# Altium PCB VECTOR.PcbDoc (part 2 of 2)
Units mm, origin at the board's own origin, x right, y up, seen from the top; angles counter-clockwise.
Board outline 152.4 x 101.6 mm, 4 copper layers (Top Layer, VCC, Ground, Bottom Layer), stack 0.778 mm thick; 115 components, 252 nets, 1062 pads, 87 vias.
Unrouted connection lines stored in the file: 78.
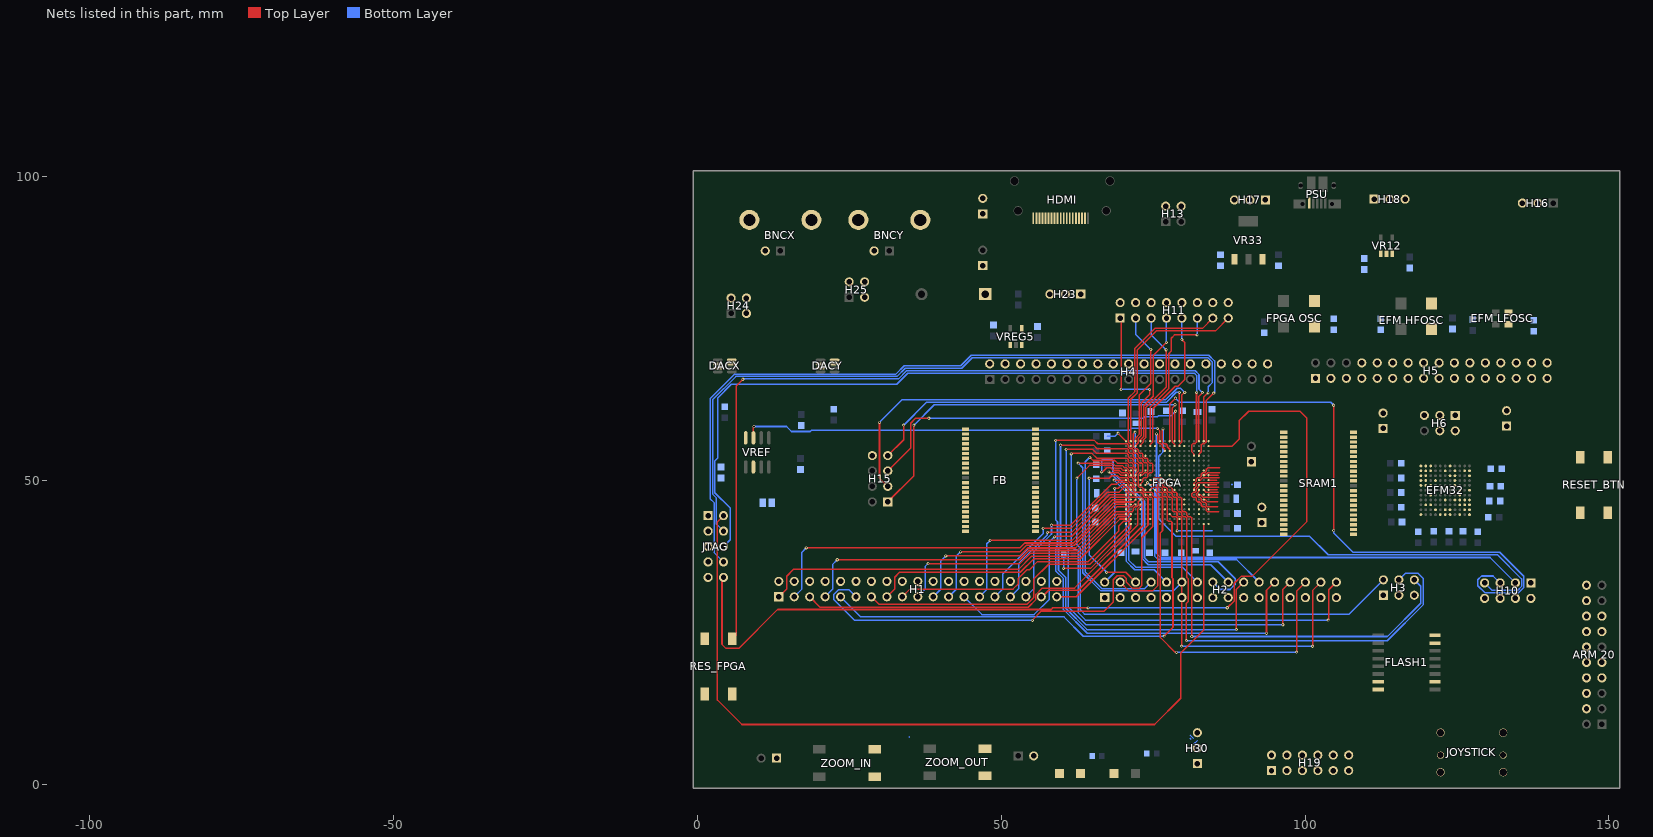
[diagram p4: the nets of this part, all layers, seen from the top]

## Via types
v1: diameter 0.508, hole 0.254, Top Layer to Bottom Layer, 87 vias

## Nets (pads, with @x,y where several pads share a name; then routed paths per layer and width w, separated by ;. In a path a pad name is that pad's centre, name@x,y a point inside that pad or via, vN(x,y) a via of type N, cw(c..) or ccw(c..) an arc to the next point about the centre after c; other vN are vias at no path point) (continued)
EBI.D3: EFM32.B3 FPGA.K15 H5.8 | length 6.1
  Top Layer w0.254: FPGA.K15@81.743,49.257 81.743,49.498 82.145,49.9 82.145,50.255 82.35,50.46 82.745,50.46 82.95,50.665 82.95,51.04 83.18,51.27 83.495,51.27 83.76,51.535 83.76,51.84 83.985,52.065 85.965,52.065
EBI.D4: EFM32.A3 FPGA.K16 H5.10 | length 8.6
  Top Layer w0.254: FPGA.K16@82.543,49.257 82.543,49.033 82.14,48.63 82.14,48.295 81.88,48.035 81.585,48.035 81.375,47.825 81.375,47.45 81.57,47.255 81.95,47.255 82.14,47.065 82.14,46.66 82.345,46.455 82.715,46.455 82.95,46.22 82.95,45.91 83.195,45.665 83.52,45.665 83.73,45.455 83.73,45.105 83.955,44.88 85.805,44.88
EBI.D5: EFM32.B2 FPGA.L15 H5.12 | length 4.9
  Top Layer w0.254: FPGA.L15@81.743,48.457 81.743,48.708 82.14,49.105 82.14,49.41 82.385,49.655 85.775,49.655
EBI.D6: EFM32.A2 FPGA.L16 H5.14 | length 5.7
  Top Layer w0.254: FPGA.L16@82.543,48.457 82.543,48.208 82.15,47.815 82.15,47.56 82.475,47.235 82.72,47.235 82.935,47.02 82.935,46.705 83.195,46.445 83.51,46.445 83.735,46.22 83.735,45.925 83.98,45.68 85.655,45.68
EBI.D7: EFM32.A1 FPGA.H17 H5.16 | length 2.8
  Top Layer w0.254: FPGA.H17@83.343,50.857 83.602,50.857 84,51.255 85.95,51.255
EBI.D8: EFM32.B1 FPGA.H18 H5.18 | length 1.6
  Top Layer w0.254: FPGA.H18@84.143,50.857 85.723,50.857
EBI.D9: EFM32.C2 FPGA.J16 H5.20 | length 3.5
  Top Layer w0.254: FPGA.J16@82.543,50.057 82.807,50.057 83.22,50.47 85.91,50.47
EBI.D10: EFM32.C1 FPGA.J18 H5.22 | length 1.4
  Top Layer w0.254: FPGA.J18@84.143,50.057 85.512,50.057
EBI.D11: EFM32.D2 FPGA.K17 H5.24 | length 2.6
  Top Layer w0.254: FPGA.K17@83.343,49.257 83.74,48.86 85.77,48.86
EBI.D12: EFM32.D1 FPGA.K18 H5.26 | length 1.4
  Top Layer w0.254: FPGA.K18@84.143,49.257 85.507,49.257
EBI.D13: EFM32.E3 FPGA.L17 H5.28 | length 2.5
  Top Layer w0.254: FPGA.L17@83.343,48.457 83.73,48.07 85.73,48.07
EBI.D14: EFM32.E2 FPGA.L18 H5.30 | length 1.4
  Top Layer w0.254: FPGA.L18@84.143,48.457 85.537,48.457
EBI.D15: EFM32.E1 FPGA.M16 H5.32 | length 3.2
  Top Layer w0.254: FPGA.M16@82.543,47.657 82.808,47.657 83.195,47.27 85.605,47.27
EBI.REN: EFM32.A7 FPGA.N17 H6.4 | length 2.5
  Top Layer w0.254: FPGA.N17@83.343,46.857 83.583,46.857 83.975,46.465 85.64,46.465
EBI.WEN: EFM32.B6 FPGA.M18 H6.2 | length 1.5
  Top Layer w0.254: FPGA.M18@84.143,47.657 85.617,47.657
FB.A0: FPGA.N4 H1.1 | length 68.1
  Top Layer w0.254: H1.1@13.445,30.865 14.74,32.16 14.74,34.26 15.84,35.36 52.865,35.36 55.07,37.565 62.82,37.565 69.325,44.07 70.65,44.07 70.925,44.345 70.925,44.625 71.16,44.86 71.585,44.86 71.725,45 71.725,45.38 72.03,45.685 72.315,45.685 72.565,45.935 72.565,46.479 FPGA.N4@72.943,46.857
FB.A1: FPGA.N3 H1.3 | length 66.3
  Top Layer w0.254: v1(17.965,38.915) 53.11,38.915 53.91,39.715 61.88,39.715 68.62,46.455 71.741,46.455 FPGA.N3@72.143,46.857
  Bottom Layer w0.254: H1.3@15.985,30.865 17.25,32.13 17.25,38.2 v1(17.965,38.915)
FB.A2: FPGA.P4 H1.5 | length 64.3
  Top Layer w0.254: H1.5@18.525,30.865 20.23,29.16 54.47,29.16 55.735,30.425 55.735,31.255 56.78,32.3 62.105,32.3 72.525,42.72 72.525,45.37 72.943,45.788 FPGA.P4@72.943,46.057
FB.A3: FPGA.P3 H1.7 | length 60
  Top Layer w0.254: v1(23.065,36.96) 53.06,36.96 54.575,38.475 62.515,38.475 68.885,44.845 70.665,44.845 70.94,45.12 70.94,45.44 71.145,45.645 71.49,45.645 71.902,46.057 FPGA.P3@72.143,46.057
  Bottom Layer w0.254: H1.7@21.065,30.865 22.295,32.095 22.295,36.19 v1(23.065,36.96)
FB.A4: FPGA.L6 H1.9 | length 84
  Top Layer w0.254: FPGA.L6@74.543,48.457 74.956,48.87 75.555,48.87 75.775,48.65 75.775,48.21 75.915,48.07 76.395,48.07 76.56,47.905 76.56,47.52 76.78,47.3 77.155,47.3 77.35,47.105 77.35,43.46 77.535,43.275 77.94,43.275 78.12,43.095 78.12,34.01 78.285,33.845 78.285,25.85 v1(76.825,24.39)
  Bottom Layer w0.254: H1.9@23.605,30.865 26.91,27.56 60.365,27.56 63.535,24.39 v1(76.825,24.39)
FB.A5: FPGA.M5 H1.11 | length 80.5
  Top Layer w0.254: v1(55.155,26.98) 55.155,27.035 56.59,28.47 66.925,28.47 68.47,30.015 68.47,33.68 69.105,34.315 70.15,34.315 70.62,33.845 70.62,33.265 71.64,32.245 72.66,32.245 73.155,32.74 73.155,40.595 74.935,42.375 74.935,47.025 74.69,47.27 74.415,47.27 74.028,47.657 FPGA.M5@73.743,47.657
  Bottom Layer w0.254: H1.11@26.145,30.865 24.96,32.05 23.315,32.05 22.485,31.22 22.485,30.43 25.935,26.98 v1(55.155,26.98)
FB.A6: FPGA.U2 H1.13 | length 51.2
  Top Layer w0.254: H1.13@28.685,30.865 29.95,29.6 54.245,29.6 55.35,30.705 55.35,33.735 57.83,36.215 64.64,36.215 71.005,42.58 ; 70.991,42.594 70.991,43.041 71.343,43.393 FPGA.U2@71.343,43.657
FB.A7: FPGA.U1 H1.15 | length 45.7
  Top Layer w0.254: H1.15@31.225,30.865 32.52,32.16 32.52,34.09 33.32,34.89 53.17,34.89 55.405,37.125 63.016,37.125 69.548,43.657 FPGA.U1@70.543,43.657
FB.A8: FPGA.T2 H1.17 | length 44.6
  Top Layer w0.254: H1.17@33.765,30.865 35.035,32.135 51.985,32.135 52.865,33.015 52.865,33.9 54.245,35.28 54.63,35.28 56.005,36.655 64.335,36.655 69.355,41.675 69.355,42.5 70.115,43.26 70.73,43.26 70.94,43.47 70.94,43.76 71.312,44.132 71.343,44.132 FPGA.T2@71.343,44.457 FPGA.T2@71.313,44.457
FB.A9: FPGA.T1 H1.19 | length 42.1
  Top Layer w0.254: v1(38.005,36.325) 53.115,36.325 54.795,38.005 62.625,38.005 69.077,44.457 FPGA.T1@70.543,44.457
  Bottom Layer w0.254: H1.19@36.305,30.865 37.51,32.07 37.51,35.83 v1(38.005,36.325)
FB.A10: FPGA.P2 H1.21 | length 41.5
  Top Layer w0.254: v1(40.9,37.595) 53.085,37.595 54.38,38.89 62.27,38.89 69.065,45.685 70.69,45.685 71.062,46.057 FPGA.P2@71.343,46.057
  Bottom Layer w0.254: H1.21@38.845,30.865 40.075,32.095 40.075,36.77 v1(40.9,37.595)
FB.A11: FPGA.P1 H1.23 | length 38.6
  Top Layer w0.254: v1(43.33,38.255) 53.115,38.255 54.19,39.33 62.045,39.33 68.772,46.057 FPGA.P1@70.543,46.057
  Bottom Layer w0.254: H1.23@41.385,30.865 42.64,32.12 42.64,37.565 v1(43.33,38.255)
FB.A12: FPGA.N2 H1.25 | length 42.3
  Top Layer w0.254: v1(58.765,40.71) 58.86,40.805 61.65,40.805 68.1,47.255 70.665,47.255 71.063,46.857 FPGA.N2@71.343,46.857
  Bottom Layer w0.254: H1.25@43.925,30.865 46.85,27.94 55.43,27.94 57.925,30.435 57.925,39.87 v1(58.765,40.71)
FB.A13: FPGA.N1 H1.27 | length 35.1
  Top Layer w0.254: v1(48.21,40.13) 61.66,40.13 68.387,46.857 FPGA.N1@70.543,46.857
  Bottom Layer w0.254: H1.27@46.465,30.865 47.655,32.055 47.655,39.575 v1(48.21,40.13)
FB.A14: FPGA.M3 H1.29 | length 33.3
  Top Layer w0.254: v1(56.92,42.115) 61.525,42.115 67.48,48.07 69.41,48.07 70.235,48.895 70.675,48.895 70.945,48.625 70.945,48.285 71.18,48.05 71.515,48.05 71.908,47.657 FPGA.M3@72.143,47.657
  Bottom Layer w0.254: H1.29@49.005,30.865 50.25,32.11 50.25,34.56 56.92,41.23 v1(56.92,42.115)
FB.A15: FPGA.M1 H1.31 | length 28.6
  Top Layer w0.254: v1(57.635,41.455) 61.61,41.455 67.812,47.657 FPGA.M1@70.543,47.657
  Bottom Layer w0.254: H1.31@51.545,30.865 52.88,32.2 52.88,36.325 57.635,41.08 v1(57.635,41.455)
FB.A16: FPGA.L2 H1.33 | length 30.3
  Top Layer w0.254: v1(58.3,42.665) 61.465,42.665 68.14,49.34 68.97,49.34 69.3,49.67 70.705,49.67 70.95,49.425 70.95,49.115 71.343,48.722 FPGA.L2@71.343,48.457
  Bottom Layer w0.254: H1.33@54.085,30.865 55.35,32.13 55.35,38.23 58.3,41.18 v1(58.3,42.665)
FB.A17: FPGA.L1 H1.35 | length 29.6
  Top Layer w0.254: H1.35@56.78,30.865 57.863,31.948 62.703,31.948 73.38,42.625 73.38,46.965 73.075,47.27 71.115,47.27 70.925,47.46 70.925,47.805 70.543,48.187 FPGA.L1@70.543,48.457
FB.A18: FPGA.K2 H1.37 | length 28.5
  Top Layer w0.254: H1.37@59.165,30.865 62.39,30.865 74.175,42.65 74.175,47.08 73.985,47.27 73.57,47.27 73.38,47.46 73.38,47.75 73.06,48.07 72,48.07 71.715,48.355 71.715,48.78 71.343,49.152 FPGA.K2@71.343,49.257
FB.CS: FPGA.J6 H3.6 | length 75.6
  Top Layer w0.254: FPGA.J6@74.543,50.057 74.747,50.057 75.145,50.455 76.345,50.455 76.56,50.24 76.56,49.95 76.855,49.655 77.17,49.655 77.35,49.475 77.35,49.155 77.635,48.87 77.955,48.87 78.16,48.665 78.16,48.305 78.395,48.07 78.74,48.07 78.945,47.865 78.945,47.495 79.17,47.27 79.54,47.27 79.72,47.09 79.72,45.13 79.98,44.87 80.325,44.87 80.545,44.65 80.545,44.31 80.81,44.045 81.18,44.045 81.36,43.865 81.36,24.35 v1(81.375,24.335)
  Bottom Layer w0.254: v1(81.375,24.335) 113.55,24.335 119.03,29.815 119.03,32.608 H3.6@117.983,33.655
FB.D0: FPGA.K1 H2.2 | length 18.2
  Top Layer w0.254: v1(68.69,48.705) 69.3,48.705 69.852,49.257 FPGA.K1@70.543,49.257
  Bottom Layer w0.254: H2.2@67.056,33.274 68.69,34.908 v1(68.69,48.705)
FB.D1: FPGA.L4 H2.4 | length 25
  Top Layer w0.254: H2.4@69.596,33.274 71.04,31.83 74.92,31.83 75.75,32.66 75.75,47.045 75.54,47.255 75.23,47.255 74.95,47.535 74.95,47.835 74.73,48.055 73.57,48.055 73.168,48.457 FPGA.L4@72.943,48.457
FB.D2: FPGA.L3 H2.6 | length 31.5
  Top Layer w0.254: v1(64.475,50.36) 67.785,50.36 68.21,50.785 69.15,50.785 69.48,50.455 70.75,50.455 70.93,50.275 70.93,49.905 71.175,49.66 71.515,49.66 71.75,49.425 71.75,49.16 72.143,48.767 FPGA.L3@72.143,48.457 ; v1(67.37,34.89) 70.52,34.89 H2.6@72.136,33.274
  Bottom Layer w0.254: v1(64.475,50.36) 64.475,37.785 v1(67.37,34.89)
FB.D3: FPGA.J3 H2.8 | length 41.7
  Top Layer w0.254: v1(64.61,53.805) 65.135,53.28 68.715,53.28 69.14,52.855 70.72,52.855 70.96,52.615 70.96,52.275 71.17,52.065 71.55,52.065 71.75,51.865 71.75,50.75 72.143,50.357 FPGA.J3@72.143,50.057
  Bottom Layer w0.254: v1(64.61,53.805) 63.865,53.06 63.865,34.95 66.65,32.165 73.567,32.165 H2.8@74.676,33.274
FB.D4: FPGA.J1 H2.10 | length 24.2
  Top Layer w0.254: v1(68.599,50.055) v1(68.599,50.055) FPGA.J1@70.543,50.057
  Bottom Layer w0.254: v1(68.599,50.055) 70.62,48.034 70.62,36.685 72,35.305 75.185,35.305 H2.10@77.216,33.274
FB.D5: FPGA.H2 H2.12 | length 46.3
  Top Layer w0.254: v1(62.68,52.865) 68.335,52.865 68.76,52.44 69.96,52.44 70.345,52.055 70.66,52.055 70.91,51.805 70.91,51.555 71.343,51.122 FPGA.H2@71.343,50.857
  Bottom Layer w0.254: v1(62.68,52.865) 63.455,52.09 63.455,34.835 66.46,31.83 78.312,31.83 H2.12@79.756,33.274
FB.D6: FPGA.H1 H2.14 | length 31.8
  Top Layer w0.254: v1(67.74,51.42) 67.89,51.27 69.31,51.27 69.723,50.857 FPGA.H1@70.543,50.857
  Bottom Layer w0.254: v1@67.795,51.42 v1(67.74,51.42) 70.98,48.18 70.98,36.93 72.19,35.72 79.85,35.72 H2.14@82.296,33.274
FB.D7: FPGA.K4 H2.16 | length 55.3
  Top Layer w0.254: v1(72.04,57.94) 71.73,57.63 71.73,55.555 72.035,55.25 72.315,55.25 72.535,55.03 72.535,54.745 72.805,54.475 73.15,54.475 73.345,54.28 73.345,53.91 73.59,53.665 73.97,53.665 74.145,53.49 74.145,53.145 74.43,52.86 74.775,52.86 74.935,52.7 74.935,51.47 74.745,51.28 74.415,51.28 74.145,51.01 74.145,50.645 73.98,50.48 73.545,50.48 73.325,50.26 73.325,49.81 72.943,49.428 FPGA.K4@72.943,49.257
  Bottom Layer w0.254: v1(72.04,57.94) 72.04,48.125 73.6,46.565 73.6,37.275 74.26,36.615 85.745,36.615 88.525,33.835 88.525,32.93 87.66,32.065 86.045,32.065 H2.16@84.836,33.274
FB.D8: FPGA.K3 H2.18 | length 45.5
  Top Layer w0.254: v1(66.54,51.42) 66.725,51.42 67.4,52.095 68.04,52.095 68.495,51.64 69.435,51.64 69.815,51.26 70.735,51.26 70.945,51.05 70.945,50.715 71.165,50.495 71.56,50.495 71.765,50.29 71.765,49.915 72.143,49.537 FPGA.K3@72.143,49.257
  Bottom Layer w0.254: v1(66.54,51.42) 66.555,51.435 66.555,53.325 66.76,53.53 68.14,53.53 68.415,53.255 68.415,51.265 73.185,46.495 73.185,37.185 74.235,36.135 84.515,36.135 H2.18@87.376,33.274
FB.D9: FPGA.L5 H2.20 | length 86.3
  Top Layer w0.254: v1(59.785,55.815) 65.22,55.815 65.805,55.23 70.77,55.23 70.925,55.075 70.925,54.72 71.17,54.475 71.535,54.475 71.74,54.27 71.74,53.925 72,53.665 72.365,53.665 72.525,53.505 72.525,53.14 72.79,52.875 73.15,52.875 73.335,52.69 73.335,51.505 73.11,51.28 72.825,51.28 72.535,50.99 72.535,49.095 72.775,48.855 73.225,48.855 73.623,48.457 FPGA.L5@73.743,48.457 ; v1(88.705,25.465) 88.705,32.063 H2.20@89.916,33.274
  Bottom Layer w0.254: v1(59.785,55.815) 59.785,39.025 59.455,38.695 59.455,35.225 60.64,34.04 60.64,28.965 64.14,25.465 v1(88.705,25.465)
FB.D10: FPGA.K5 H2.22 | length 32
  Top Layer w0.254: FPGA.K5@73.743,49.257 73.752,49.257 v1(74.12,49.625)
  Bottom Layer w0.254: v1(74.12,49.625) 75.255,48.49 75.255,37.575 75.83,37 88.73,37 H2.22@92.456,33.274
FB.D11: FPGA.H4 H2.24 | length 92.7
  Top Layer w0.254: v1(58.985,56.59) 65.355,56.59 65.91,56.035 70.745,56.035 70.94,55.84 70.94,55.525 71.205,55.26 71.555,55.26 71.73,55.085 71.73,54.74 71.995,54.475 72.315,54.475 72.545,54.245 72.545,53.945 72.83,53.66 73.13,53.66 73.35,53.44 73.35,53.13 73.6,52.88 73.93,52.88 74.13,52.68 74.13,51.475 73.93,51.275 73.59,51.275 73.172,50.857 FPGA.H4@72.943,50.857 ; v1(93.67,24.855) 93.67,31.948 H2.24@94.996,33.274
  Bottom Layer w0.254: v1(58.985,56.59) 58.985,43.5 59.29,43.195 59.29,39.245 59.015,38.97 59.015,35.11 60.255,33.87 60.255,28.77 64.17,24.855 v1(93.67,24.855)
FB.D12: FPGA.H3 H2.26 | length 85.3
  Top Layer w0.254: v1(60.695,55.1) 65.08,55.1 65.73,54.45 70.735,54.45 70.94,54.245 70.94,53.92 71.21,53.65 71.54,53.65 71.765,53.425 71.765,53.135 72.035,52.865 72.335,52.865 72.535,52.665 72.535,51.5 72.143,51.108 FPGA.H3@72.143,50.857 ; v1(96.37,26.265) 96.37,32.108 H2.26@97.536,33.274
  Bottom Layer w0.254: v1(60.695,55.1) 60.695,39.22 61.08,38.835 61.08,29.16 63.975,26.265 v1(96.37,26.265)
FB.D13: FPGA.L7 H2.28 | length 60.7
  Top Layer w0.254: FPGA.L7@75.343,48.457 75.343,48.182 75.735,47.79 75.735,47.56 76.04,47.255 76.395,47.255 76.56,47.09 76.56,41.73 76.215,41.385 76.215,24.17 78.67,21.715 v1(78.865,21.715) ; v1(98.63,21.77) 98.63,31.828 H2.28@100.076,33.274
  Bottom Layer w0.254: v1(78.865,21.715) 98.575,21.715 v1(98.63,21.77)
FB.D14: FPGA.K6 H2.30 | length 63.4
  Top Layer w0.254: FPGA.K6@74.543,49.257 74.772,49.257 75.155,49.64 75.53,49.64 75.765,49.405 75.765,49.115 75.995,48.885 76.355,48.885 76.55,48.69 76.55,48.355 76.85,48.055 77.145,48.055 77.32,47.88 77.32,47.6 77.665,47.255 77.955,47.255 78.145,47.065 78.145,45.105 78.38,44.87 78.755,44.87 78.945,44.68 78.945,44.295 79.18,44.06 79.55,44.06 79.72,43.89 79.72,22.79 v1(79.69,22.76) ; v1(101.25,22.735) 101.25,31.908 H2.30@102.616,33.274
  Bottom Layer w0.254: v1(79.69,22.76) 101.225,22.76 v1(101.25,22.735)
FB.D15: FPGA.G3 H2.32 | length 87.6
  Top Layer w0.254: v1(61.55,54.385) 61.605,54.44 64.97,54.44 65.73,53.68 70.73,53.68 70.94,53.47 70.94,53.125 71.185,52.88 71.56,52.88 71.75,52.69 71.75,52.345 72.143,51.952 FPGA.G3@72.143,51.657 ; v1(103.815,27.035) 103.895,27.115 103.895,32.013 H2.32@105.156,33.274
  Bottom Layer w0.254: v1(61.55,54.385) 61.55,39.19 62.125,38.615 62.49,38.615 62.665,38.44 62.665,28.265 63.895,27.035 v1(103.815,27.035)
FB.REN: FPGA.J7 H3.4 | length 80.7
  Top Layer w0.254: FPGA.J7@75.343,50.057 75.593,50.057 75.995,49.655 76.355,49.655 76.56,49.45 76.56,49.15 76.855,48.855 77.17,48.855 77.36,48.665 77.36,48.28 77.585,48.055 77.915,48.055 78.16,47.81 78.16,47.52 78.435,47.245 78.74,47.245 78.945,47.04 78.945,45.15 79.235,44.86 79.55,44.86 79.745,44.665 79.745,44.325 80.025,44.045 80.34,44.045 80.56,43.825 80.56,34.05 80.82,33.79 80.82,30.145 80.49,29.815 v1(80.49,23.645) v1@80.56,23.715
  Bottom Layer w0.254: v1(80.49,23.645) 113.52,23.645 119.475,29.6 119.475,33.84 118.59,34.725 116.513,34.725 H3.4@115.443,33.655
FB.WEN: FPGA.G1 H3.2 | length 83.7
  Top Layer w0.254: v1(62.47,50.385) 62.475,50.385 64.555,52.465 68.25,52.465 68.675,52.04 69.695,52.04 70.078,51.657 FPGA.G1@70.543,51.657
  Bottom Layer w0.254: v1(62.47,50.385) 62.47,39.475 63.04,38.905 63.04,28.715 63.73,28.025 107.273,28.025 H3.2@112.903,33.655
FPGAB.CLK+: FPGA.B2 H11.13 | length 31.6
  Top Layer w0.254: FPGA.B2@71.343,55.657 71.343,55.922 70.93,56.335 70.93,63.545 72.025,64.64 72.025,71.75 75.28,75.005 83.133,75.005 H11.13@84.836,76.708
FPGAB.CLK-: FPGA.A2 H11.15 | length 32.6
  Top Layer w0.254: FPGA.A2@71.343,56.457 71.343,63.348 72.44,64.445 72.44,71.505 75.525,74.59 85.258,74.59 H11.15@87.376,76.708
FPGAB.D0+: FPGA.B6 H11.9 | length 23.9
  Top Layer w0.254: FPGA.B6@74.543,55.657 74.543,55.908 74.955,56.32 74.955,61.805 78.645,65.495 79.115,65.495 80.21,66.59 80.21,72.69 v1(79.745,73.155)
  Bottom Layer w0.254: v1(79.745,73.155) 79.745,76.697 H11.9@79.756,76.708
FPGAB.D0-: FPGA.A6 H11.11 | length 25.6
  Top Layer w0.254: FPGA.A6@74.543,56.457 74.543,62.083 77.57,65.11 77.57,70.845 78.01,71.285 78.01,73.405 78.535,73.93 v1(82.255,73.93)
  Bottom Layer w0.254: v1(82.255,73.93) 82.296,73.971 H11.11@82.296,76.708
FPGAB.D1+: FPGA.B4 H11.5 | length 23.8
  Top Layer w0.254: FPGA.B4@72.943,55.657 72.943,55.853 73.365,56.275 73.365,56.605 73.82,57.06 73.82,61.99 77.155,65.325 v1(77.155,71.505)
  Bottom Layer w0.254: H11.5@74.676,76.708 74.676,73.984 v1(77.155,71.505)
FPGAB.D1-: FPGA.A4 H11.7 | length 22
  Top Layer w0.254: FPGA.A4@72.943,56.457 72.943,56.708 73.475,57.24 73.475,62.285 75.03,63.84 75.03,70.535 v1(77.21,72.715)
  Bottom Layer w0.254: v1(77.21,72.715) 77.21,76.702 H11.7@77.216,76.708
FPGAB.D2+: FPGA.B3 H11.1 | length 27.2
  Top Layer w0.254: H11.1@69.596,76.708 69.74,76.564 v1(69.74,64.97) ; FPGA.B3@72.143,55.657 72.143,55.783 72.565,56.205 72.565,56.89 73.1,57.425 73.1,62.79 74.455,64.145 v1(74.455,64.985)
  Bottom Layer w0.254: H11.1@69.596,76.708 H11.1@69.905,76.399 ; v1(69.74,64.97) 69.755,64.985 v1(74.455,64.985)
FPGAB.D2-: FPGA.A3 H11.3 | length 22.3
  Top Layer w0.254: FPGA.A3@72.143,56.457 72.143,56.993 72.715,57.565 72.715,64 74.645,65.93 v1(74.645,71.56)
  Bottom Layer w0.254: H11.3@72.136,76.708 72.136,74.069 v1(74.645,71.56)
GND: "ARM 20.4" "ARM 20.6" "ARM 20.8" "ARM 20.10" "ARM 20.12" "ARM 20.14" "ARM 20.16" "ARM 20.18" "ARM 20.20" "EFM HFOSC.2" "EFM LFOSC.2" "FPGA OSC.2" C1.1 C2.1 C3.1 C4.1 C5.1 C6.1 C7.1 C8.1 C9.1 C10.1 C11.1 C12.1 C13.1 C14.1 C15.1 C16.1 C17.1 C18.1 C19.1 C20.1 C21.1 C22.1 C23.1 C24.1 C25.1 C26.1 C27.1 C28.1 C29.1 C30.1 C31.1 C32.2 C33.2 C34.2 C35.2 C36.2 C37.2 C38.1 C39.2 C40.1 C41.1 C42.1 C43.1 C44.2 C45.2 C46.1 C47.1 C48.2 C49.1 C54.1 C55.1 C56.1 C57.1 C58.1 C59.1 D1.2 D5.2 DACX.6 DACY.6 EFM32.C7 EFM32.D4 EFM32.F9 EFM32.G3 EFM32.G9 EFM32.H6 EFM32.K4 EFM32.K7 EFM32.K10 EFM32.L7 FB.12 FB.34 FB.39 FB.40 FLASH1.10 FPGA.A1 FPGA.A18 FPGA.B7 FPGA.B13 FPGA.C3 FPGA.C16 FPGA.D5 FPGA.D10 FPGA.E15 FPGA.G2 FPGA.G5 FPGA.G12 FPGA.G17 FPGA.H8 FPGA.H10 FPGA.J4 FPGA.J9 FPGA.J11 FPGA.J15 FPGA.K8 FPGA.K10 FPGA.L9 FPGA.L11 FPGA.M2 FPGA.M6 FPGA.M17 FPGA.N13 FPGA.P13 FPGA.R1 FPGA.R4 FPGA.R9 FPGA.R14 FPGA.R16 FPGA.R18 FPGA.T16 FPGA.U6 FPGA.U12 FPGA.V1 FPGA.V18 H16.3 H17.1 H18.1 H23.3 HDMI.2 HDMI.5 HDMI.8 HDMI.11 HDMI.14 HDMI.17 JTAG.3 JTAG.5 JTAG.7 JTAG.9 PSU.5 RES_FPGA.2 RES_FPGA.4 RESET_BTN.1 RESET_BTN.3 SRAM1.12 SRAM1.34 SRAM1.39 SRAM1.40 VR12.2 VR33.1 VREF.4 ZOOM_IN.2 ZOOM_IN.4 ZOOM_OUT.2 ZOOM_OUT.4 | length 3.9
  Top Layer w0.254: v1(69.245,57.775) 69.245,57.755 FPGA.A1@70.543,56.457
  Bottom Layer w0.254: C8.1@67.448,57.277 68.747,57.277 v1(69.245,57.775)
HDMI.5V: H14.2 HDMI.18
HDMI.CEC: H12.1 HDMI.13
HDMI.CLK+: H11.14 HDMI.10
HDMI.CLK-: H11.16 HDMI.12
HDMI.D0+: H11.10 HDMI.7
HDMI.D0-: H11.12 HDMI.9
HDMI.D1+: H11.6 HDMI.4
HDMI.D1-: H11.8 HDMI.6
HDMI.D2+: H11.2 HDMI.1
HDMI.D2-: H11.4 HDMI.3
HDMI.DDC_CLK: H13.2 HDMI.15
HDMI.DDC_DATA: H13.4 HDMI.16
"NetARM 20_7": "ARM 20.7" EFM32.E8
"NetARM 20_9": "ARM 20.9" EFM32.D8
"NetARM 20_13": "ARM 20.13" EFM32.C8
"NetARM 20_15": "ARM 20.15" EFM32.K6 RESET_BTN.2 RESET_BTN.4
NetBNCX_2: BNCX.2 H24.4
NetBNCY_2: BNCY.2 H25.4
NetC37_1: C37.1 EFM32.B11
NetC38_2: C38.2 EFM32.B8 EFM32.B10
NetC39_1: C39.1 EFM32.F11
NetC40_2: C40.2 H17.2 VR33.3
NetC42_2: C42.2 H18.2 VR12.1 VR12.3
NetC48_1: C48.1 C49.2 H30.3 VREF.6 | length 0.2
  Bottom Layer w0.254: 81.11,7.562 81.229,7.442
NetC55_2: "EFM LFOSC.3" C55.2 H26.1
NetC57_2: "EFM HFOSC.3"@120.839,79.134 C57.2 H27.1
NetC59_2: "FPGA OSC.3"@101.535,79.515 C59.2 H28.1
NetC60_2: C60.2 H23.2 VREG5.1 VREG5.3
NetC61_2: C61.2 VREG5.4
NetD4_1: D4.1 R2.1
NetD5_1: D5.1 R3.1
NetDACX_3: DACX.3 DACY.3 H30.2
NetDACX_4: DACX.4 H24.3
NetDACY_4: DACY.4 H25.3
NetEFM32_C11: EFM32.C11 H30.1
NetEFM32_H8: EFM32.H8 H19.12
NetEFM32_H9: EFM32.H9 H19.6
NetEFM32_H10: EFM32.H10 H19.8
NetEFM32_H11: EFM32.H11 H19.10
NetEFM32_J2: EFM32.J2 JTAG.1
NetEFM32_J3: EFM32.J3 H29.1
NetEFM32_J9: EFM32.J9 H21.1
NetEFM32_J10: EFM32.J10 H19.2
NetEFM32_J11: EFM32.J11 H19.4
NetEFM32_K11: EFM32.K11 H20.2
NetEFM32_L1: EFM32.L1 H26.2
NetEFM32_L5: EFM32.L5 H24.2
NetEFM32_L6: EFM32.L6 H25.2
NetEFM32_L9: EFM32.L9 H27.2
NetEFM32_L11: EFM32.L11 H10.1
NetFB_1: FB.1 H1.2
NetFB_2: FB.2 H1.4
NetFB_3: FB.3 H1.6
NetFB_4: FB.4 H1.8
NetFB_5: FB.5 H1.10
NetFB_6: FB.18 H1.12
NetFB_7: FB.19 H1.14
NetFB_8: FB.20 H1.16
NetFB_9: FB.21 H1.18
NetFB_10: FB.22 H1.20
NetFB_11: FB.23 H1.22
NetFB_12: FB.24 H1.24
NetFB_13: FB.25 H1.26
NetFB_14: FB.26 H1.28
NetFB_15: FB.27 H1.30
NetFB_16: FB.42 H1.32
NetFB_17: FB.43 H1.34
NetFB_18: FB.44 H1.36
NetFB_19: FB.28 H1.38
NetFB_24: FB.7 H2.1
NetFB_25: FB.8 H2.3
NetFB_26: FB.9 H2.5
NetFB_27: FB.10 H2.7
NetFB_28: FB.13 H2.9
NetFB_29: FB.14 H2.11
NetFB_30: FB.15 H2.13
NetFB_31: FB.16 H2.15
NetFB_32: FB.29 H2.17
NetFB_33: FB.30 H2.19
NetFB_34: FB.31 H2.21
NetFB_35: FB.32 H2.23
NetFB_36: FB.35 H2.25
NetFB_37: FB.36 H2.27
NetFB_38: FB.37 H2.29
NetFB_39: FB.38 H2.31
NetFB_40: FB.17 H3.1
NetFB_41: FB.41 H3.3 | length 0.6
  Bottom Layer w0.254: 34.9,7.798 34.918,7.816 ; 81.153,8.052 81.585,7.62
NetFB_44: FB.6 H3.5 | length 0.7
  Bottom Layer w0.254: 81.767,6.68 82.25,7.163
NetFLASH1_1: FLASH1.15 H10.2
NetFLASH1_2: FLASH1.8 H10.4
NetFLASH1_5: FLASH1.7 H10.6
NetFLASH1_6: FLASH1.16 H10.8
NetFPGA_A8: FPGA.A8 VREF.3 | length 71.1
  Top Layer w0.254: VREF.3@9.271,57.01 9.271,58.781 v1(9.365,58.875) ; v1(75.705,58.56) 76.143,58.122 FPGA.A8@76.143,56.457
  Bottom Layer w0.254: v1(9.365,58.875) 14.71,58.875 15.535,58.05 18.625,58.05 18.845,58.27 71.145,58.27 71.435,58.56 v1(75.705,58.56)
NetFPGA_A10: FPGA.A10 H10.5 | length 104.8
  Top Layer w0.254: FPGA.A10@77.743,56.457 77.743,62.578 v1(78.7,63.535) ; v1(104.72,41.765) v1(104.72,62.375)
  Bottom Layer w0.254: v1(78.7,63.535) 79.39,62.845 104.25,62.845 v1(104.72,62.375) ; v1(104.72,41.765) 104.72,41.37 107.89,38.2 132.02,38.2 135.985,34.235 135.985,32.38 135.16,31.555 129.565,31.555 128.435,32.685 128.435,33.68 129.04,34.285 130.942,34.285 H10.5@132.08,33.147
NetFPGA_A11: FPGA.A11 H15.5 | length 58.8
  Top Layer w0.254: H15.5@31.369,51.562 35.14,55.333 35.14,59.425 35.945,60.23 v1(38.12,60.23) ; FPGA.A11@78.543,56.457 78.543,61.203 v1(78.725,61.385)
  Bottom Layer w0.254: v1(38.12,60.23) 73.405,60.23 73.65,60.475 75.72,60.475 75.86,60.615 77.955,60.615 v1(78.725,61.385)
NetFPGA_A12: FPGA.A12 H15.7 | length 61.7
  Top Layer w0.254: H15.7@31.369,54.102 33.98,56.713 v1(33.98,59.095) ; v1(79.335,64.5) 79.343,64.492 FPGA.A12@79.343,56.457
  Bottom Layer w0.254: v1(33.98,59.095) 37.76,62.875 77.21,62.875 78.835,64.5 v1(79.335,64.5)
NetFPGA_A16: FPGA.A16 RES_FPGA.1 RES_FPGA.3 | length 130.7
  Top Layer w0.254: RES_FPGA.3@5.77,23.959 6.44,24.629 6.44,65.545 v1(7.545,66.65) ; FPGA.A16@82.543,56.457 82.543,63.853 v1(83.135,64.445)
  Bottom Layer w0.254: v1(7.545,66.65) 7.605,66.71 33.13,66.71 34.45,68.03 81.95,68.03 82.56,67.42 82.56,65.02 v1(83.135,64.445)
NetFPGA_A17: FPGA.A17 JTAG.4 | length 121.3
  Top Layer w0.254: FPGA.A17@83.343,56.457 83.343,63.743 83.99,64.39 v1(84.075,64.39)
  Bottom Layer w0.254: JTAG.4@4.35,41.67 3.19,42.83 3.19,47.13 2.555,47.765 2.555,63.29 6.385,67.12 32.905,67.12 34.255,68.47 43.545,68.47 45.255,70.18 84.05,70.18 84.71,69.52 84.71,66.045 84.075,65.41 v1(84.075,64.39)
NetFPGA_B11: FPGA.B11 H15.1 | length 65.9
  Top Layer w0.254: H15.1@31.369,46.482 35.665,50.778 v1(35.665,59.095) ; FPGA.B11@78.543,55.657 78.543,55.937 78.145,56.335 78.145,61.91 78.615,62.38 v1(78.615,62.46)
  Bottom Layer w0.254: v1(35.665,59.095) 39.03,62.46 v1(78.615,62.46)
NetFPGA_B12: FPGA.B12 H15.3 | length 73.1
  Top Layer w0.254: v1(30.01,59.565) 30.01,50.381 H15.3@31.369,49.022 ; FPGA.B12@79.343,55.657 79.343,55.903 79.745,56.305 79.745,64.06 80.16,64.475 v1(80.215,64.475)
  Bottom Layer w0.254: v1(30.01,59.565) 33.705,63.26 77.07,63.26 78.97,65.16 79.53,65.16 v1(80.215,64.475)
NetFPGA_B18: FPGA.B18 JTAG.10 | length 155.9
  Top Layer w0.254: JTAG.10@4.35,34.05 4.1,33.8 4.1,23.035 4.76,22.375 6.85,22.375 13.245,28.77 58.245,28.77 58.52,29.045 v1(64.335,29.045) ; FPGA.B18@84.143,55.657 88.022,55.657 89.15,56.785 89.15,59.82 90.73,61.4 99.19,61.4 100.265,60.325 100.265,43.18 91.35,34.265 89.545,34.265 88.46,33.18 88.35,33.18 88.35,30.18 87.23,29.06 v1(87.215,29.06)
  Bottom Layer w0.254: v1(64.335,29.045) 64.35,29.06 v1(87.215,29.06) ; 87.96,49.31 88.045,49.395
NetFPGA_C9: FPGA.C9 H10.3 | length 84.3
  Top Layer w0.254: v1(75.57,57.665) 75.765,57.47 75.765,56.3 76,56.065 76.3,56.065 76.52,55.845 76.52,55.555 76.943,55.132 FPGA.C9@76.943,54.857
  Bottom Layer w0.254: v1(75.57,57.665) 75.57,37.995 76.235,37.33 130.437,37.33 H10.3@134.62,33.147
NetFPGA_C10: FPGA.C10 H10.7 | length 91.3
  Top Layer w0.254: v1(76.645,58.49) 76.645,58.475 76.54,58.37 76.54,56.285 76.775,56.05 77.075,56.05 77.335,55.79 77.335,55.535 77.743,55.127 FPGA.C10@77.743,54.857
  Bottom Layer w0.254: v1(76.645,58.49) 76.645,54.69 75.94,53.985 75.94,43.665 78.77,40.835 100.745,40.835 103.82,37.76 131.66,37.76 135.63,33.79 135.63,32.575 134.995,31.94 130.747,31.94 H10.7@129.54,33.147
NetFPGA_D15: FPGA.D15 JTAG.6 | length 120.7
  Top Layer w0.254: FPGA.D15@81.743,54.057 81.743,54.342 81.34,54.745 81.34,55.825 81.595,56.08 81.915,56.08 82.15,56.315 82.15,64.455 v1(82.17,64.475)
  Bottom Layer w0.254: JTAG.6@4.35,39.13 5.45,40.23 5.45,45.45 2.91,47.99 2.91,53.195 3.435,53.72 3.435,63.62 5.64,65.825 32.85,65.825 34.67,67.645 81.81,67.645 82.17,67.285 v1(82.17,64.475)
NetFPGA_D16: FPGA.D16 JTAG.8 | length 130.9
  Top Layer w0.254: FPGA.D16@82.543,54.057 82.543,54.328 82.945,54.73 82.945,55.855 83.17,56.08 83.48,56.08 83.77,56.37 83.77,63.15 v1(84.985,64.365)
  Bottom Layer w0.254: JTAG.8@4.35,36.59 2.855,38.085 2.855,46.285 2.17,46.97 2.17,63.48 6.195,67.505 32.715,67.505 34.095,68.885 43.385,68.885 45.095,70.595 84.185,70.595 85.12,69.66 85.12,64.5 v1(84.985,64.365)
NetFPGA_T10: FPGA.T10 H28.2 | length 9.4
  Top Layer w0.254: FPGA.T10@77.743,44.457 78.14,44.06 78.74,44.06 78.975,43.825 v1(78.975,41.69)
  Bottom Layer w0.254: v1(78.975,41.69) 84.74,41.69
NetFPGA_V2: FPGA.V2 R1.1 | length 16.9
  Top Layer w0.254: v1(60.255,35.525) 64.72,35.525 71.343,42.148 FPGA.V2@71.343,42.857
  Bottom Layer w0.254: v1(60.255,35.525) 60.287,35.557 R1.1@60.287,37.846
NetFPGA_V17: FPGA.V17 JTAG.2 | length 140.7
  Top Layer w0.254: JTAG.2@4.35,44.21 3.355,43.215 3.355,13.885 7.38,9.86 75.255,9.86 79.555,14.16 79.555,21.635 83.343,25.423 FPGA.V17@83.343,42.857
NetH4_2: H4.2 SRAM1.1
NetH4_4: H4.4 SRAM1.2
NetH4_6: H4.6 SRAM1.3
NetH4_8: H4.8 SRAM1.4
NetH4_10: H4.10 SRAM1.5
NetH4_12: H4.12 SRAM1.18
NetH4_14: H4.14 SRAM1.19
NetH4_16: H4.16 SRAM1.20
NetH4_18: H4.18 SRAM1.21
NetH4_20: H4.20 SRAM1.22
NetH4_22: H4.22 SRAM1.23
NetH4_24: H4.24 SRAM1.24
NetH4_26: H4.26 SRAM1.25
NetH4_28: H4.28 SRAM1.26
NetH4_30: H4.30 SRAM1.27
NetH4_32: H4.32 SRAM1.42
NetH4_34: H4.34 SRAM1.43
NetH4_36: H4.36 SRAM1.44
NetH4_38: H4.38 SRAM1.28
NetH5_1: H5.1 SRAM1.7
NetH5_3: H5.3 SRAM1.8
NetH5_5: H5.5 SRAM1.9
NetH5_7: H5.7 SRAM1.10
NetH5_9: H5.9 SRAM1.13
NetH5_11: H5.11 SRAM1.14
NetH5_13: H5.13 SRAM1.15
NetH5_15: H5.15 SRAM1.16
NetH5_17: H5.17 SRAM1.29
NetH5_19: H5.19 SRAM1.30
NetH5_21: H5.21 SRAM1.31
NetH5_23: H5.23 SRAM1.32
NetH5_25: H5.25 SRAM1.35
NetH5_27: H5.27 SRAM1.36
NetH5_29: H5.29 SRAM1.37
NetH5_31: H5.31 SRAM1.38
NetH6_1: H6.1 SRAM1.17
NetH6_3: H6.3 SRAM1.41
NetH6_5: H6.5 SRAM1.6
NetH14_1: H14.1 H16.2 H17.3 H18.3 H23.1
NetH19_1: H19.1 JOYSTICK.3
NetH19_3: H19.3 JOYSTICK.2
NetH19_5: H19.5 JOYSTICK.1
NetH19_7: H19.7 JOYSTICK.6
NetH19_9: H19.9 JOYSTICK.5
NetH19_11: H19.11 JOYSTICK.4
SYNC: DACX.7 DACY.7 H15.8
pads on no net: "ARM 20.2" "ARM 20.3" "ARM 20.5" "ARM 20.11" "ARM 20.17" "ARM 20.19" "EFM HFOSC.1" "EFM HFOSC.3"@114.362,73.537 "EFM LFOSC.1" "FPGA OSC.1" "FPGA OSC.3"@95.058,73.918 EFM32.A6 EFM32.A8 EFM32.A10 EFM32.A11 EFM32.B5 EFM32.B7 EFM32.C4 EFM32.C5 EFM32.C6 EFM32.C10 EFM32.D3 EFM32.D11 EFM32.E5 EFM32.E6 EFM32.E7 EFM32.F5 EFM32.F6 EFM32.F7 EFM32.G5 EFM32.G6 EFM32.G7 EFM32.H1 EFM32.H2 EFM32.H3 EFM32.H4 EFM32.H5 EFM32.J1 EFM32.J5 EFM32.J6 EFM32.K1 EFM32.K2 EFM32.K5 EFM32.L2 EFM32.L8 FLASH1.1 FLASH1.3 FLASH1.4 FLASH1.5 FLASH1.6 FLASH1.9 FLASH1.11 FLASH1.12 FLASH1.13 FLASH1.14 FPGA.A5 FPGA.A7 FPGA.A9 FPGA.A13 FPGA.A14 FPGA.A15 FPGA.B8 FPGA.B9 FPGA.B14 FPGA.B16 FPGA.C1 FPGA.C2 FPGA.C4 FPGA.C5 FPGA.C6 FPGA.C7 FPGA.C8 FPGA.C11 FPGA.C12 FPGA.C13 FPGA.C14 FPGA.C15 FPGA.D1 FPGA.D2 FPGA.D3 FPGA.D4 FPGA.D6 FPGA.D8 FPGA.D9 FPGA.D11 FPGA.D12 FPGA.D14 FPGA.E1 FPGA.E3 FPGA.E4 FPGA.E6 FPGA.E7 FPGA.E8 FPGA.E11 FPGA.E12 FPGA.E13 FPGA.F1 FPGA.F2 FPGA.F3 FPGA.F4 FPGA.F5 FPGA.F6 FPGA.F7 FPGA.F8 FPGA.F9 FPGA.F10 FPGA.F11 FPGA.F12 FPGA.F13 FPGA.G6 FPGA.G8 FPGA.G9 FPGA.G11 FPGA.H5 FPGA.H6 FPGA.H7 FPGA.L14 FPGA.M8 FPGA.M10 FPGA.M11 FPGA.M13 FPGA.M14 FPGA.N5 FPGA.N6 FPGA.N7 FPGA.N8 FPGA.N9 FPGA.N10 FPGA.N11 FPGA.N12 FPGA.N14 FPGA.N15 FPGA.N16 FPGA.P6 FPGA.P7 FPGA.P8 FPGA.P11 FPGA.P12 FPGA.P15 FPGA.P16 FPGA.P17 FPGA.P18 FPGA.R3 FPGA.R5 FPGA.R7 FPGA.R8 FPGA.R10 FPGA.R11 FPGA.R13 FPGA.R15 FPGA.T3 FPGA.T4 FPGA.T5 FPGA.T6 FPGA.T7 FPGA.T8 FPGA.T9 FPGA.T11 FPGA.T12 FPGA.T13 FPGA.T14 FPGA.T15 FPGA.T17 FPGA.T18 FPGA.U3 FPGA.U5 FPGA.U7 FPGA.U8 FPGA.U10 FPGA.U11 FPGA.U13 FPGA.U15 FPGA.U16 FPGA.U17 FPGA.U18 FPGA.V3 FPGA.V4 FPGA.V5 FPGA.V6 FPGA.V7 FPGA.V8 FPGA.V9 FPGA.V10 FPGA.V11 FPGA.V12 FPGA.V13 FPGA.V14 FPGA.V15 FPGA.V16 H12.2 H13.1 H13.3 HDMI. HDMI.19 PSU. PSU.2 PSU.3 PSU.4 VR12.4 VR33.4 VREF.1 VREF.5 VREF.7 VREF.8

## Polygon pours and split planes (outlines as drawn)
no net on VCC (split plane): 42.162,77.016 34.744,69.598 -0.125,69.598 -0.125,100.455 42.162,100.455
no net on VCC (split plane): 151.255,-0.125 -0.125,-0.125 -0.125,69.34 34.798,69.34 34.848,69.349 34.89,69.377 42.383,76.87 42.411,76.912 42.42,76.962 42.42,100.455 151.255,100.455
AGND on Ground (split plane): 42.035,100.276 42.035,76.762 34.744,69.471 -0.125,69.471 -0.125,100.455 41.856,100.455
GND on Ground (split plane): 151.255,-0.125 -0.125,-0.125 -0.125,69.213 34.798,69.213 34.848,69.222 34.89,69.25 42.256,76.616 42.284,76.658 42.293,76.708 42.293,100.33 42.284,100.38 42.256,100.422 42.223,100.455 151.255,100.455

## Other copper
Ground (plane layer: these items are gaps in the copper):
  lines w0.254: -0.889,69.342 34.798,69.342 42.164,76.708 42.164,100.33 41.529,100.965 -0.381,100.965 -0.635,100.711
VCC (plane layer: these items are gaps in the copper):
  lines w0.254: -0.635,69.469 34.798,69.469 42.291,76.962 42.291,100.965 -0.635,100.965

## Silkscreen, mask and mechanical layers (free items; w line width, h text height)
Top Overlay:
  drawing of 3078 lines, arcs and shapes, not listed
  text "Christian De Frene" at 19.558,26.67 h1.52
  text "O" at 19.304,23.876 h1.52
  text "yvind Robertsen" at 20.828,23.368 h1.52
  text "Helmer Nj" at 19.558,21.336 h1.52
  text "a" at 32.512,21.336 h1.52
  text "e" at 33.528,21.336 h1.52
  text "rheim" at 35.052,21.336 h1.52
  text "Jonas Halland" at 19.558,18.923 h1.52
  text "Jonatan Lund" at 19.558,16.256 h1.52
  text "Havard Lian" at 19.558,13.462 h1.52
  text "Anders Lima" at 19.558,10.922 h1.52

## Text inside footprints (layer, text, board x,y; h text height)
"ARM 20": Top Overlay "20" at 146.812,34.29 h1.27 r90; Top Overlay "19" at 149.352,34.29 h1.27 r90; Top Overlay "1" at 149.352,7.366 h1.27 r90; Top Overlay "2" at 146.812,7.366 h1.27 r90
H1: Top Overlay "2" at 10.905,32.897 h1.27; Top Overlay "1" at 10.905,30.357 h1.27; Top Overlay "37" at 60.689,30.357 h1.27; Top Overlay "38" at 60.689,32.897 h1.27
H2: Top Overlay "2" at 64.516,32.766 h1.27; Top Overlay "1" at 64.516,30.226 h1.27; Top Overlay "31" at 106.68,30.226 h1.27; Top Overlay "32" at 106.68,32.766 h1.27
H3: Top Overlay "6" at 119.507,33.147 h1.27; Top Overlay "5" at 119.507,30.607 h1.27; Top Overlay "2" at 110.363,33.147 h1.27; Top Overlay "1" at 110.871,30.607 h1.27
H4: Top Overlay "2" at 45.595,68.657 h1.27; Top Overlay "1" at 45.595,66.117 h1.27; Top Overlay "37" at 95.379,66.117 h1.27; Top Overlay "38" at 95.379,68.657 h1.27
H5: Top Overlay "2" at 99.187,68.834 h1.27; Top Overlay "1" at 99.187,66.294 h1.27; Top Overlay "31" at 141.351,66.294 h1.27; Top Overlay "32" at 141.351,68.834 h1.27
H6: Top Overlay "6" at 118.11,58.674 h1.27 r180; Top Overlay "5" at 118.11,61.214 h1.27 r180; Top Overlay "2" at 127.254,58.674 h1.27 r180; Top Overlay "1" at 126.746,61.214 h1.27 r180
H10: Top Overlay "2" at 139.7,31.115 h1.27 r180; Top Overlay "1" at 139.192,33.655 h1.27 r180; Top Overlay "7" at 128.016,33.655 h1.27 r180; Top Overlay "8" at 128.016,31.115 h1.27 r180
H11: Top Overlay "2" at 67.056,78.74 h1.27; Top Overlay "1" at 67.056,76.2 h1.27; Top Overlay "15" at 88.9,76.2 h1.27; Top Overlay "16" at 88.9,78.74 h1.27
H13: Top Overlay "1" at 75.057,92.075 h1.27; Top Overlay "2" at 74.549,94.615 h1.27; Top Overlay "4" at 81.153,94.615 h1.27; Top Overlay "3" at 81.153,92.075 h1.27
H15: Top Overlay "2" at 29.337,43.942 h1.27 r90; Top Overlay "1" at 31.877,44.45 h1.27 r90; Top Overlay "7" at 31.877,55.626 h1.27 r90; Top Overlay "8" at 29.337,55.626 h1.27 r90
H19: Top Overlay "12" at 109.22,4.318 h1.27; Top Overlay "1" at 110.236,1.778 h1.27; Top Overlay "1" at 109.22,1.778 h1.27; Top Overlay "1" at 91.948,1.778 h1.27; Top Overlay "2" at 91.948,4.318 h1.27
H24: Top Overlay "3" at 9.652,76.962 h1.27; Top Overlay "4" at 9.652,79.502 h1.27; Top Overlay "2" at 3.048,79.502 h1.27; Top Overlay "1" at 3.556,76.962 h1.27
H25: Top Overlay "3" at 29.083,79.629 h1.27; Top Overlay "4" at 29.083,82.169 h1.27; Top Overlay "2" at 22.479,82.169 h1.27; Top Overlay "1" at 22.987,79.629 h1.27
JTAG: Top Overlay "10" at 3.842,32.526 h1.27 r270; Top Overlay "9" at 1.302,32.526 h1.27 r270; Top Overlay "1" at 1.302,46.242 h1.27 r270; Top Overlay "2" at 3.842,46.75 h1.27 r270